# EAGLE board DualHBridge (EAGLE 6.4)

Size 50.8 x 34.29 mm. Coordinates in mm from the lower left corner, seen from the top.
Outline: 0,34.29 0,0 50.8,0 50.8,34.29 0,34.29
Copper layers (1*16): Top 0.0356mm / dielectric 1.5011mm / Bottom 0.0356mm
Design rules "LaenPCBOrder": minimum track width 6mil, minimum drill 13mil, track to track 6mil, track to pad 6mil, pad to pad 6mil, via to via 6mil, smd to smd 6mil, copper to edge 15mil, drill to drill 6mil, minimum pad ring 7mil, minimum via ring 7mil, stop-mask expansion 4mil, vias tented up to drill 0mil, thermal gap 10mil

## Footprints (pad centres in the part's own frame; a part is rotated, then mirrored left to right if it is on the bottom)
1,6/0,8 = drill 0.813 pad 1.6 octagon: 1 0,0
SIP-10 = drill 0.8 pad 1.27 long: 1 -11.43,0; 2 -8.89,0; 3 -6.35,0; 4 -3.81,0; 5 -1.27,0; 6 1.27,0; 7 3.81,0; 8 6.35,0; 9 8.89,0; 10 11.43,0
D-5 = drill 0.813 octagon: A 2.54,0; C -2.54,0
TO220V = drill 1.016 long: 1 -2.54,-2.54; 2 0,-2.54; 3 2.54,-2.54
2,8 = hole 2.8: 0,0
R-5 = drill 0.813 pad 1.6 octagon: 1 -2.54,0; 2 2.54,0
DIL18 = drill 0.813 long: 1 -10.16,-3.81; 2 -7.62,-3.81; 3 -5.08,-3.81; 4 -2.54,-3.81; 5 0,-3.81; 6 2.54,-3.81; 7 5.08,-3.81; 8 7.62,-3.81; 9 10.16,-3.81; 10 10.16,3.81; 11 7.62,3.81; 12 5.08,3.81; 13 2.54,3.81; 14 0,3.81; 15 -2.54,3.81; 16 -5.08,3.81; 17 -7.62,3.81; 18 -10.16,3.81

## Placement (x,y rotation side)
E$1  [1,6/0,8]  4.83,12.7 0 top
E$2  [1,6/0,8]  13.97,31.24 0 top
E$3  [SIP-10]  10.41,13.97 90 top
E$4  [D-5]  4.06,8.64 180 top
E$5  [D-5]  4.06,6.6 180 top
E$6  [D-5]  4.06,4.57 180 top
E$7  [D-5]  4.06,2.54 180 top
E$12  [1,6/0,8]  16.51,31.24 0 top
E$13  [TO220V]  34.04,15.24 270 top
E$14  [TO220V]  38.99,15.24 270 top
E$15  [TO220V]  43.94,15.24 270 top
E$16  [TO220V]  48.9,15.24 270 top
E$17  [1,6/0,8]  30.99,2.54 90 top
E$18  [1,6/0,8]  36.07,2.54 90 top
E$19  [1,6/0,8]  38.61,2.54 90 top
E$20  [1,6/0,8]  41.15,2.54 90 top
E$21  [1,6/0,8]  33.53,2.54 90 top
E$24  [SIP-10]  25.15,13.97 270 top
E$25  [1,6/0,8]  28.45,2.54 90 top
E$26  [1,6/0,8]  4.83,22.86 0 top
E$27  [1,6/0,8]  2.29,20.32 0 top
E$28  [1,6/0,8]  4.83,20.32 0 top
E$29  [TO220V]  34.04,27.94 270 top
E$30  [TO220V]  38.99,27.94 270 top
E$31  [TO220V]  43.94,27.94 270 top
E$32  [TO220V]  48.9,27.94 270 top
E$33  [1,6/0,8]  2.29,22.86 0 top
E$34  [1,6/0,8]  4.83,17.78 0 top
E$35  [1,6/0,8]  2.29,15.24 0 top
E$36  [1,6/0,8]  4.83,15.24 0 top
E$37  [1,6/0,8]  2.29,17.78 0 top
E$38  [1,6/0,8]  21.59,31.24 0 top
E$39  [1,6/0,8]  19.05,31.24 0 top
E$40  [2,8]  5.08,29.21 0 top
E$42  [2,8]  45.72,5.08 0 top
E$44  [R-5]  35.05,6.6 180 top
ULN2803  ULN2803  [DIL18]  17.78,12.7 270 top

## Library data of the parts
E$1 E$2 E$12 E$17-E$21 E$25-E$28 E$33-E$39 = wirepad
E$3 E$24 = linear
E$4-E$7 = diode
E$13-E$16 E$29-E$32 = transistor-pnp
E$40 E$42 = holes
E$44 = discrete
ULN2803 = 40xx

## Nets
S$1: E$12.1 E$24.10 E$29.3 E$30.3 E$31.3 E$32.3 E$38.1 ULN2803.10
S$2: E$3.7 E$26.1
S$3: E$3.8 E$4.C ULN2803.2
S$4: E$3.6 E$5.C ULN2803.4
S$5: E$3.4 E$6.C ULN2803.6
S$6: E$24.2 E$29.1 ULN2803.18
S$7: E$24.6 E$31.1 ULN2803.14
S$8: E$13.1 E$24.3 ULN2803.17
S$9: E$24.4 E$30.1 ULN2803.16
S$10: E$14.1 E$24.5 ULN2803.15
S$11: E$4.A E$33.1 ULN2803.1
S$12: E$1.1 E$2.1 E$25.1 E$39.1 E$44.2 ULN2803.9
S$13: E$15.1 E$24.7 ULN2803.13
S$14: E$24.8 E$32.1 ULN2803.12
S$15: E$16.1 E$24.9 ULN2803.11
S$16: E$3.5 E$28.1
S$17: E$5.A E$27.1 ULN2803.3
S$18: E$3.3 E$34.1
S$19: E$6.A E$37.1 ULN2803.5
S$20: E$3.1 E$36.1
S$21: E$7.A E$35.1 ULN2803.7
S$22: E$3.2 E$7.C ULN2803.8
S$24: E$13.3 E$14.3 E$15.3 E$16.3 E$17.1 E$44.1
S$25: E$13.2 E$21.1 E$29.2
S$26: E$14.2 E$18.1 E$30.2
S$27: E$15.2 E$19.1 E$31.2
S$28: E$16.2 E$20.1 E$32.2

## Tracks (layer width: path | path; a pad name or v marks a point on that pad's centre or on a via)
S$1  (7 unrouted)
S$2  (1 unrouted)
S$3  (2 unrouted)
S$4  (2 unrouted)
S$5  (2 unrouted)
S$6  (2 unrouted)
S$7  (2 unrouted)
S$8  (2 unrouted)
S$9  (2 unrouted)
S$10  (2 unrouted)
S$11  (2 unrouted)
S$12  (5 unrouted)
S$13  (2 unrouted)
S$14  (2 unrouted)
S$15  (2 unrouted)
S$16  (1 unrouted)
S$17  (2 unrouted)
S$18  (1 unrouted)
S$19  (2 unrouted)
S$20  (1 unrouted)
S$21  (2 unrouted)
S$22  (2 unrouted)
S$24  (5 unrouted)
S$25  (2 unrouted)
S$26  (2 unrouted)
S$27  (2 unrouted)
S$28  (2 unrouted)

## Text on the board
tNames: Dual H-Bridge | Power In | GND | VDD | GND | VDD | Logic In | P-Channel | H1 | F1 | H2 | F2 | H3 | F3 | H4 | F4 | N-Channel | GND | Shunt | Sense Out | Power Out | H | F | 1 | REF | SNS | O1 | O2 | O3 | O4 | Brent M. Spell